# Altium PCB Green_house.PcbDoc
Units mm, origin at the board's own origin, x right, y up, seen from the top; angles counter-clockwise.
Board outline 137.29 x 102.74 mm, 2 copper layers (Top Layer, Bottom Layer); 42 components, 35 nets, 132 pads, 0 vias.
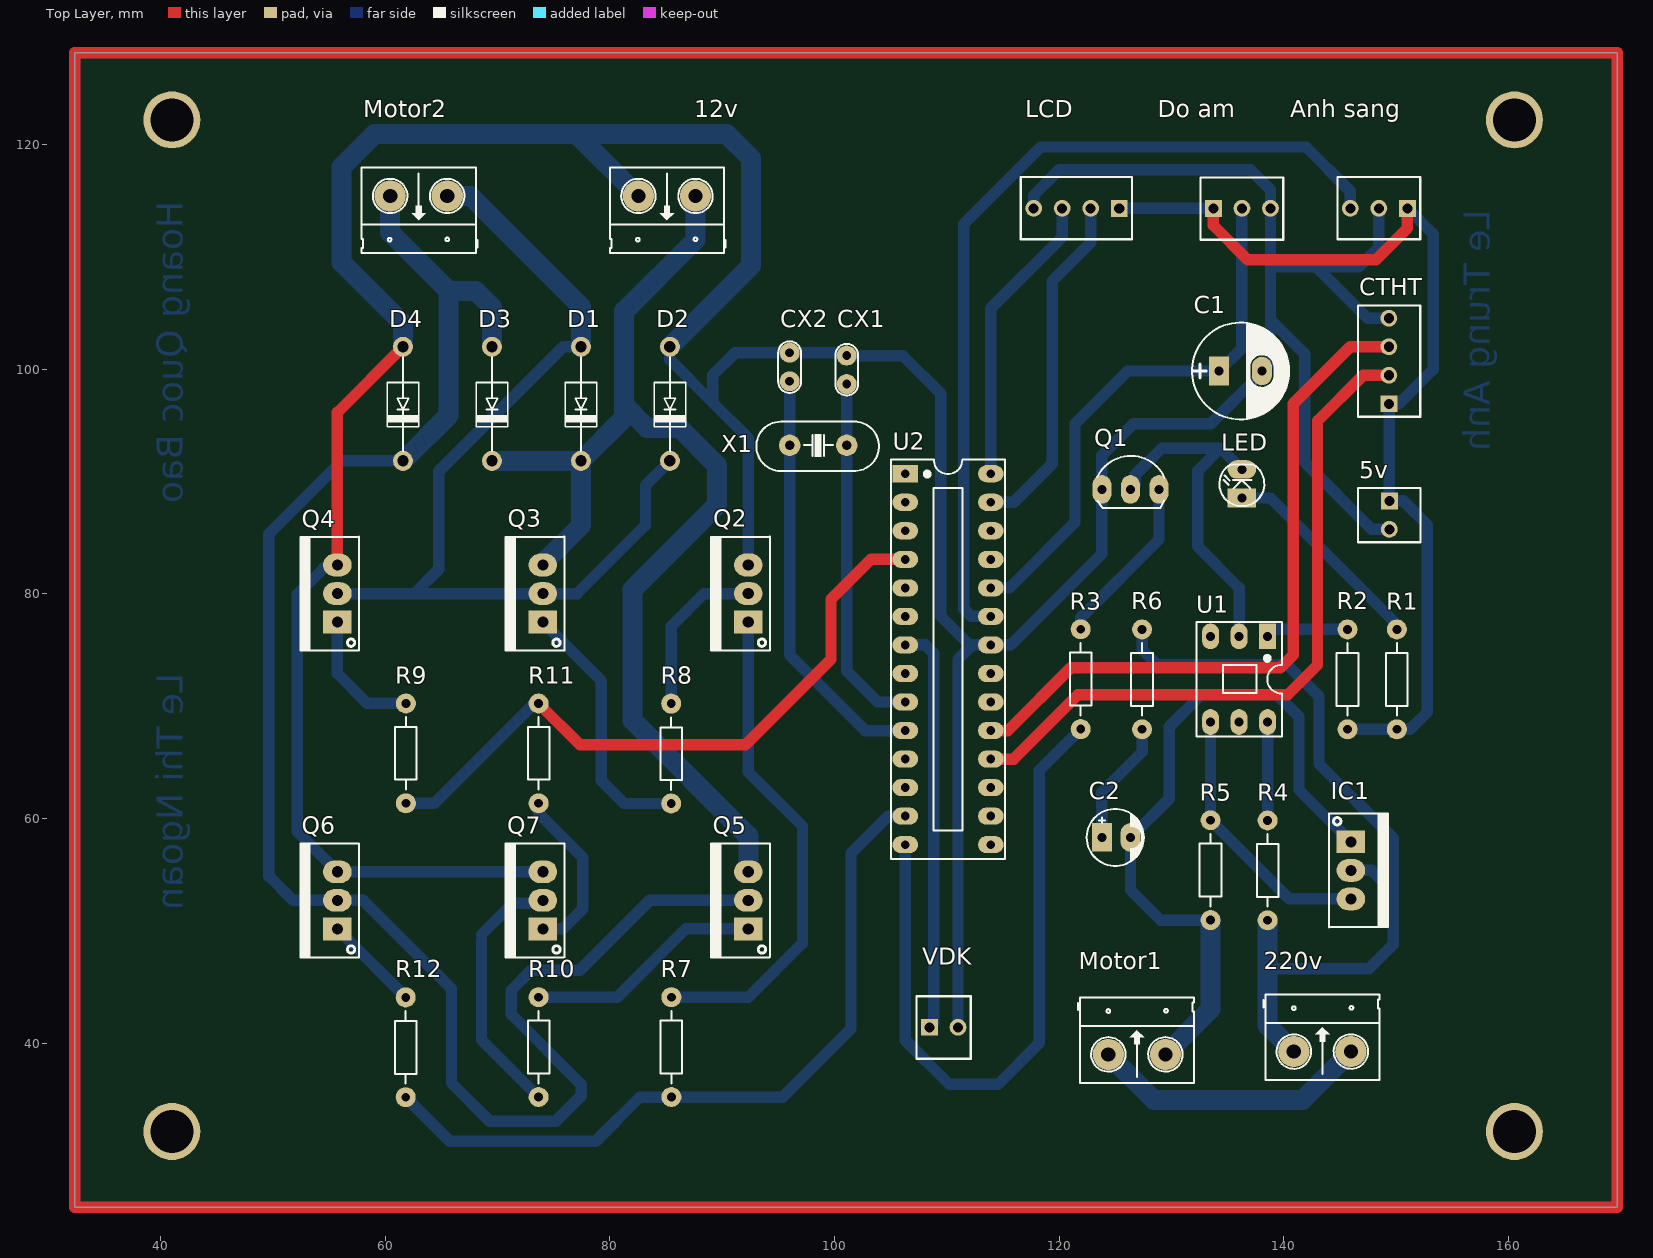
[diagram p0: Top Layer view]
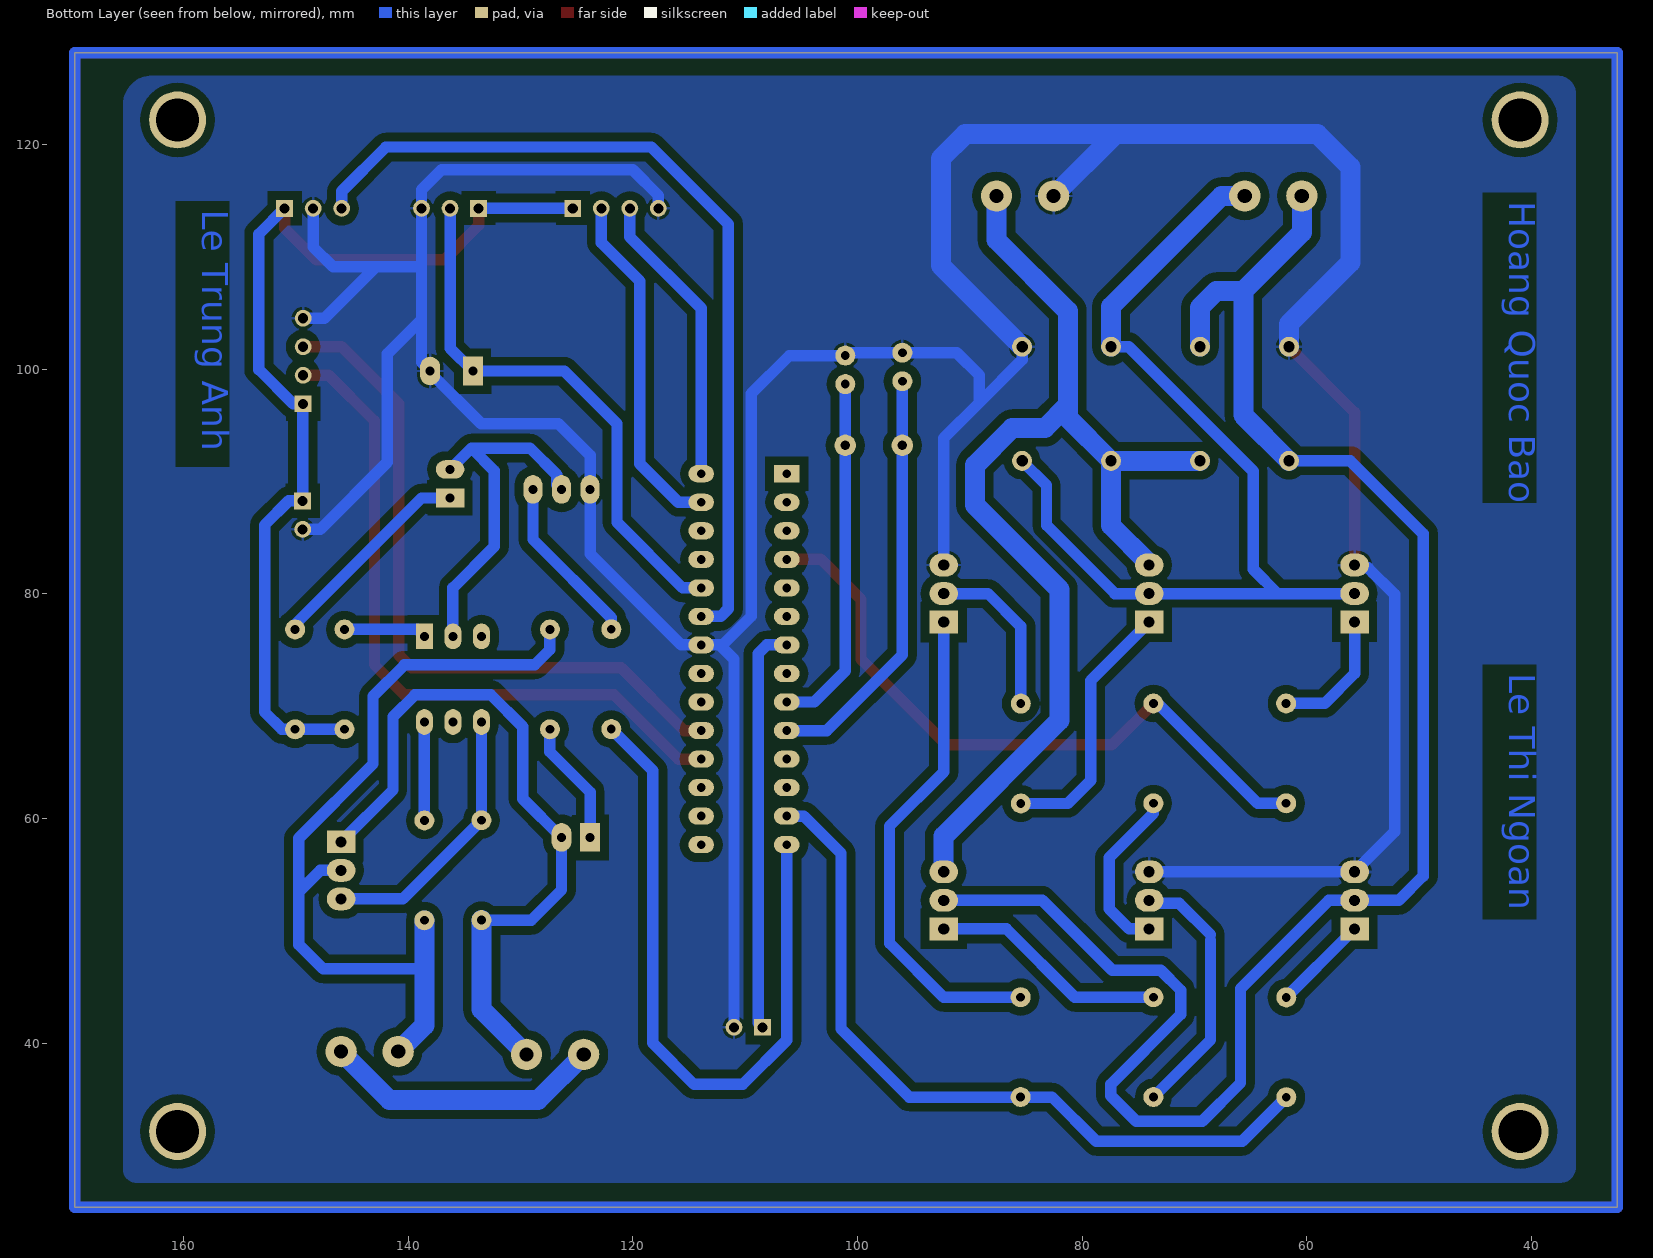
[diagram p1: Bottom Layer view, seen from below]
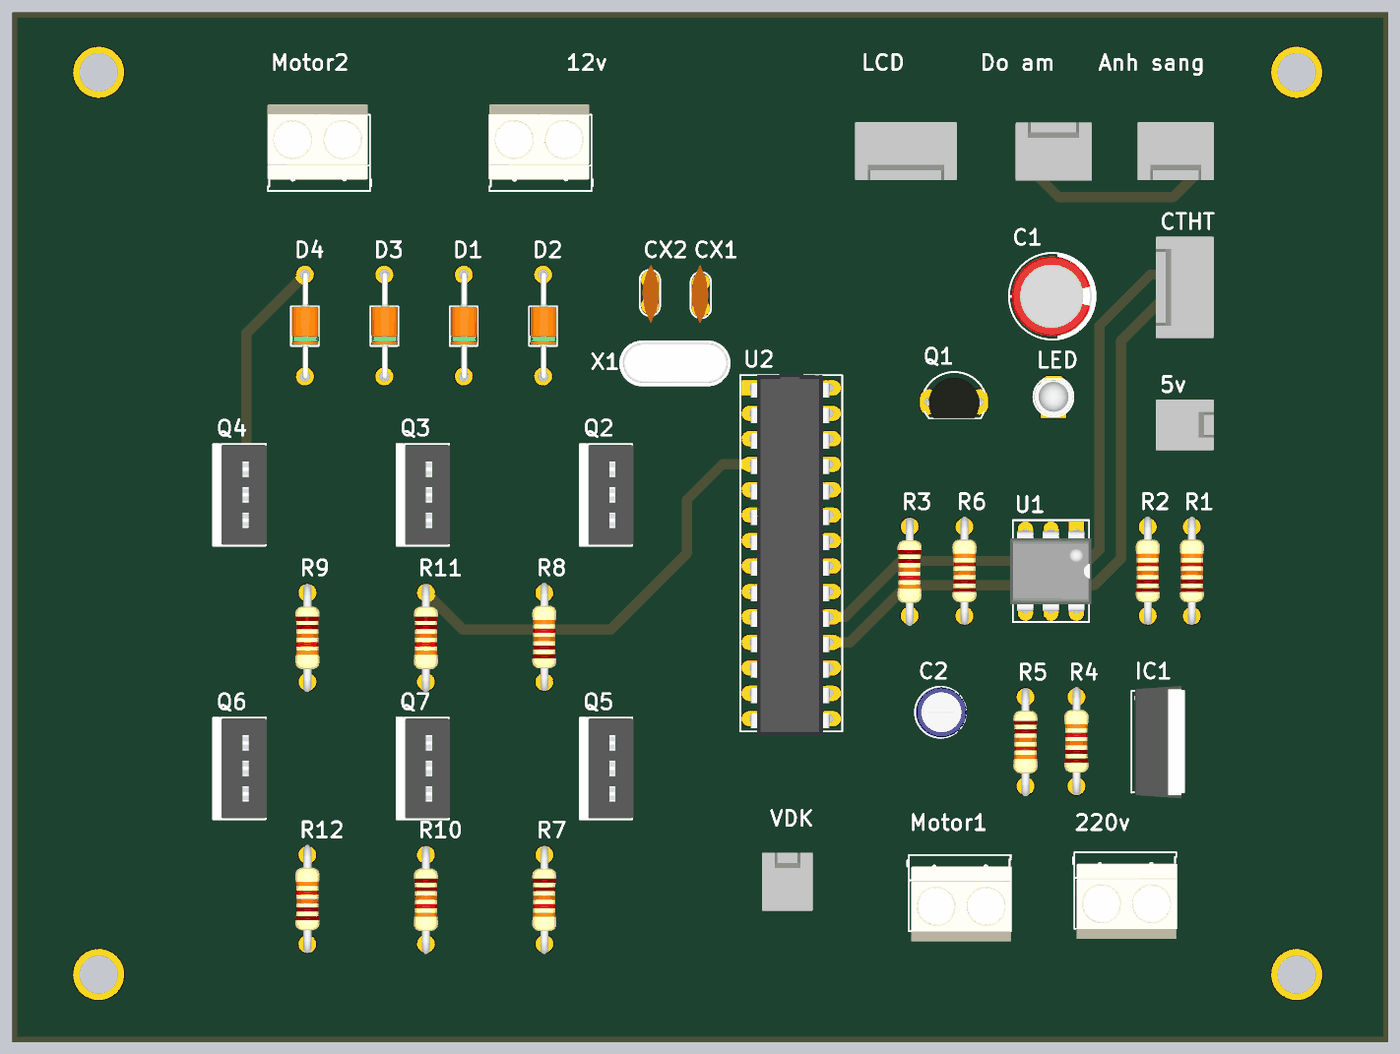
[diagram p2: 3D render of the assembled board from above, using the file's embedded part models]

## Layer stack, top to bottom
Top Solder: solder mask 0.0102, Solder Resist, Dk 3.5
Top Layer: signal copper 0.0356
Dielectric 1: dielectric 0.32, FR-4, Dk 4.8
Bottom Layer: signal copper 0.0356
Bottom Solder: solder mask 0.0102, Solder Resist, Dk 3.5

## Board outline
32.385,25.4 32.385,128.143 169.672,128.143 169.672,25.4

## Design rules (kind name [scope] priority, off if disabled: settings)
Clearance [All] p1: gap=0.762 ignorepadtopadclearanceinfootprint=FALSE
PolygonConnect [All] p1: connectstyle=Relief reliefconductorwidth=0.254 reliefentries=4 polygonreliefangle="90 Angle" airgapwidth=0.254
RoutingVias [All] p1: holewidth=0.711 width=1.27 viastyle="Through Hole" minholewidth=0.711 minwidth=1.27 maxholewidth=0.711 maxwidth=1.27
SolderMaskExpansion [All] p1: expansion=0.102
Width [All] p1: maxlimit=2.286 minlimit=1.016 preferedwidth=1.778
30 further rules are at their usual default settings.

## Components (designator, comment, footprint, x,y, rotation, side; value= is the part's Value field where it differs from the comment)
5v "Header 2" HDR2 149.393,88.265 r270 top
12v "Header 2" HED2 87.63,115.402 r180 top
220v "Hed2" HED2 140.892,39.243 r0 top value="Header 2"
"Anh sang" "Header3" HDR3 151.003,114.3 r180 top
C1 "100uF" CP1.5/3.4 134.239,99.822 r0 top value=100uF/35V/50V
C2 "10uF" CP1/2 123.81,58.306 r0 top value=10uF/50V
CTHT "Header4" HDR4 149.353,96.901 r90 top
CX1 "100pF" CN1 101.092,98.655 r90 top
CX2 "100pF" CN1 96.012,101.449 r270 top
D1 "Diode" DIO-1A 77.436,101.981 r270 top value=1N5007
D2 "Diode" DIO-1A 85.357,101.981 r270 top value=1N5007
D3 "Diode" DIO-1A 69.516,101.981 r270 top value=1N5007
D4 "Diode" DIO-1A 61.595,101.981 r270 top value=1N5007
"Do am" "Header 3" HDR3 133.731,114.3 r0 top
IC1 "BT137" QTO-220 145.972,57.912 r270 top value=LM317
LCD "Header4" HDR4 125.349,114.3 r180 top
LED "LED" LED-3 136.271,88.519 r90 top value="LED 3 ly Single Colour"
Motor1 "Header 2" HED2 124.384,38.989 r0 top
Motor2 "Header 2" HED2 65.532,115.402 r180 top
Q1 "C1815" QTO-92 126.35,89.281 r0 top
Q2 "TIP41C" TO220-123 92.329,77.47 r90 top
Q3 "TIP42C" TO220-123 74.041,77.47 r90 top
Q4 "TIP41C" TO220-123 55.753,77.47 r90 top
Q5 "TIP42C" TO220-123 92.329,50.165 r90 top
Q6 "TIP41C" TO220-123 55.753,50.165 r90 top
Q7 "TIP41C" TO220-123 74.041,50.165 r90 top
R1 "Res1" R1/4W 150.062,76.82 r270 top value=1K
R2 "Res1" R1/4W 145.67,76.82 r270 top value=220
R3 "Res1" R1/4W 121.92,67.945 r90 top value=1K
R4 "Res1" R1/4W 138.557,59.817 r270 top value=220
R5 "Res1" R1/4W 133.477,50.942 r90 top value=330
R6 "Res1" R1/4W 127.381,76.82 r270 top value=1K
R7 "Res1" R1/4W 85.483,35.194 r90 top value=1K
R8 "Res1" R1/4W 85.471,70.216 r270 top value=1K
R9 "Res1" R1/4W 61.849,61.341 r90 top value=1K
R10 "Res1" R1/4W 73.666,35.194 r90 top value=1K
R11 "Res1" R1/4W 73.666,61.341 r90 top value=1K
R12 "Res1" R1/4W 61.837,44.069 r270 top value=1K
U1 "MOC3021" DIP6/W0.3 138.557,76.2 r180 top
U2 "ATmega328-PU" DIP28 106.299,90.678 r270 top
VDK "Header 2" HDR2 108.458,41.402 r0 top
X1 "12Mhz" XT2 98.552,93.205 r180 top value=4Mhz

## Footprints (in the part's own frame and the unit in brackets; to place one, negate y for a bottom-side part, rotate by r counter-clockwise, add the part's x,y. Pads: shape width x height; smd on the part's side, far side on the other; paste and mask are expansions set on the pad)
CN1 [mil]
  round 70 hole 31: 1(0,0) 2(100,0)
  silkscreen extent -40,-40 141,40, body extent -60,-30 170,37, height 265
CP1.5/3.4 [mil] "Tu hoa 220->470uF,16V, 470uF/16V,25V"
  rect 70x100 hole 32: 1(0,0)
  oval 70x100 hole 32: 2(150,0)
  silkscreen extent -95,-170 245,170, body extent -85,-157 230,157, height 446
CP1/2 [mil] "Tu hoa < 22uF/16>50V"
  rect 70x100 hole 32: 1(0,0)
  oval 70x100 hole 32: 2(100,0)
  silkscreen extent -53,-100 147,100, body extent -49,-99 149,99, height 287
DIO-1A [mil]
  round 70 hole 40: 1(0,0) 2(400,0)
  silkscreen extent 35,-55 365,55, body extent -11,-50 411,54, height 102
DIP6/W0.3 [mil] "6 PIN, W 300mil, Pin to pin 100mil"
  rect 60x90 hole 31.5: 1(0,0)
  oval 60x90 hole 31.5: 2(100,0) 3(200,0) 4(200,300) 5(100,300) 6(0,300)
  silkscreen extent -50,-50 250,350, body extent -58,-7 260,307, height 170
DIP28 [mil] "DIP, 18-Leads, Row Spacing 7.62mm, Pitch 2.54mm, Body 22.8x7.3mm, Window"
  rect 60x90 hole 31: 1(0,0)
  oval 60x90 hole 31: 2(100,0) 3(200,0) 4(300,0) 5(400,0) 6(500,0) 7(600,0) 8(700,0) 9(800,0) 10(900,0) 11(1000,0) 12(1100,0) 13(1200,0) 14(1300,0) 15(1300,300) 16(1200,300) 17(1100,300) 18(1000,300) 19(900,300) 20(800,300) 21(700,300) 22(600,300) 23(500,300) 24(400,300) 25(300,300) 26(200,300) 27(100,300) 28(0,300)
  silkscreen extent -50,-50 1350,350, body extent -50,-10 1367,300, height 200
HDR2 [mm] "Connector; Header; 2 Position"
  rect 1.5x1.5 hole 0.9: 1(0,0)
  round 1.5 hole 0.9: 2(2.54,0)
  silkscreen extent -1.14,-2.79 3.68,2.77, body extent -1.27,-2.92 3.81,2.88, height 11.72
HDR3 [mm] "Connector; Header; 3 Position"
  rect 1.5x1.5 hole 0.9: 1(0,0)
  round 1.5 hole 0.9: 2(2.54,0) 3(5.08,0)
  silkscreen extent -1.14,-2.79 6.22,2.74, body extent -1.27,-2.92 6.35,2.88, height 11.72
HDR4 [mm] "Connector; Header; 4 Position"
  rect 1.5x1.5 hole 0.9: 1(0,0)
  round 1.5 hole 0.9: 2(2.54,0) 3(5.08,0) 4(7.62,0)
  silkscreen extent -1.14,-2.79 8.76,2.74, body extent -1.27,-2.92 8.89,2.88, height 11.72
HED2 [mil] "Header 2, 2 pin, hight 300mil, Pin to Pin 200, Colour Green"
  round 110 hole 50: 1(0,0) 2(200,0)
  silkscreen extent -106,-100 300,200, body extent -92,-140 302,155, height 394
LED-3 [mil] "LED 2 PIN, 3ly Only colour"
  rect 65x100 hole 32: 1(0,0)
  oval 65x100 hole 32: 2(100,0)
  silkscreen extent -29,-78 118,79, body extent -25,-75 113,75, height 217
QTO-92 [mil] "TO-92"
  oval 66x100 hole 32: 1(-100,0) 2(0,0) 3(100,0)
  silkscreen extent -117,-65 120,118, body extent -109,-66 109,95, height 245
QTO-220 [mil] "TO-220 - 1-2-3"
  rect 80x100 hole 39: 1(0,0)
  oval 80x100 hole 39: 2(100,0) 3(200,0)
  silkscreen extent -100,-76 300,130, body extent -119,-64 322,121, height 755
R1/4W [mil] "R 1/4W, 2 Pin, 350mil"
  round 70 hole 31: 1(0,0) 2(350,0)
  silkscreen extent 48,-38 302,38, body extent -40,-47 386,47, height 111
TO220-123 [mil] "TO-220 - 1-2-3"
  rect 80x100 hole 39: 1(0,0)
  oval 80x100 hole 39: 2(100,0) 3(200,0)
  silkscreen extent -100,-76 300,130, body extent -95,-80 295,97, height 323
XT2 [mil] "Footpin for Crystal 2 pin"
  round 75 hole 34: 1(-100,0) 2(100,0)
  silkscreen extent -213,-83 217,90, body extent -216,-87 216,90, height 144

## Part data
5v VDK: library part Header2, "Header IDC, 2 x 1 Pin Vertical 2.54mm Pitch (Non-Boxed, Male)", Manufacturer="Würth Elektronik eiSos GmbH", partNo=613002143121, ComponentLink1 Description=Manufacturer, ComponentLink1URL=http://www.we-online.com, ComponentLink2 Description=Datasheet, ComponentLink2URL=http://katalog.we-online.de/em/datasheet/6130xx143121.pdf, Created by="Karrer Zheng", Created Date="29 March 2013", NoPins=02
12v Motor1 Motor2: library part Hed2, "Header 2 (Green)"
220v: "Header 2 (Green)"
"Anh sang": "Header IDC, 3 x 1 Pin Vertical 2.54mm Pitch (Non-Boxed, Male)", Manufacturer="Würth Elektronik eiSos GmbH", partNo=613002143121, ComponentLink1 Description=Manufacturer, ComponentLink1URL=http://www.we-online.com, ComponentLink2 Description=Datasheet, ComponentLink2URL=http://katalog.we-online.de/em/datasheet/6130xx143121.pdf, Created by="Karrer Zheng", Created Date="29 March 2013", NoPins=02
C1: library part CP3, "Cap 100uF/35V - 470uF/16V", Description 1="1000uF/6,3V - 470uF/16V - 330uF - 25V", Description 2="220uF/35V - 100uF/50V - 63V - 4,7uF/200V", Description 3="22uF => 33uF100V - 3,3uF => 4,7uF/250V", Description 4="2,2uF =>3,3uF/350 - 2,2uF/400V - 1uF/450V"
C2: library part CP1, "Cap P  0,1uF < 22uF , 16 - 50V", Description 1="10 => 220uF/6,3V/10V - 10uF => 100uF/16V", Description 2="0,1uF => 33uF/50V - 10uF => 22uF/63V", Description 3="0,47uF => 10uF/100V"
CTHT LCD: "Header IDC, 4 x 1 Pin Vertical 2.54mm Pitch (Non-Boxed, Male)", Manufacturer="Würth Elektronik eiSos GmbH", partNo=613002143121, ComponentLink1 Description=Manufacturer, ComponentLink1URL=http://www.we-online.com, ComponentLink2 Description=Datasheet, ComponentLink2URL=http://katalog.we-online.de/em/datasheet/6130xx143121.pdf, Created by="Karrer Zheng", Created Date="29 March 2013", NoPins=02
CX1 CX2: library part CN1, "Cap np  1pF - 472pF"
D1 D2 D3 D4: "Default Diode", Code - JEDEC=DO-214-AB, Published=8-Jun-2000, Publisher="Altium Limited", Revision="July-2002: Re-released for DXP Platform."
"Do am": library part Header3, "Header IDC, 3 x 1 Pin Vertical 2.54mm Pitch (Non-Boxed, Male)", Manufacturer="Würth Elektronik eiSos GmbH", partNo=613002143121, ComponentLink1 Description=Manufacturer, ComponentLink1URL=http://www.we-online.com, ComponentLink2 Description=Datasheet, ComponentLink2URL=http://katalog.we-online.de/em/datasheet/6130xx143121.pdf, Created by="Karrer Zheng", Created Date="29 March 2013", NoPins=02
IC1: "Triacs - 8A"
LED: "LED Single colour Green and Red"
Q1: "NPN 600mW, ECB", =C2383
Q2 Q4 Q6 Q7: "NPN 2W, BCE", =H1061
Q3 Q5: "PNP 2W, BCE", =A671
R1 R2 R3 R4 R5 R6 R7 R8 R9 R10 R11 R12: library part Res1_1, "Resistor", Manufacturer="Generic Components", Class=Passive, Published=08/06/2000, Publisher="Altium Hobart Technology Centre", SubClass=Resistor
U1: "Single Opto"
U2: "8-bit AVR Microcontroller, 32KB Flash, 1KB EEPROM, 2KB SRAM, 28-pin PDIP, Industrial Grade (-40癈 to 85癈)", Supplier Part Number 1=ATMEGA328-PU-ND, ComponentLink1Description="Manufacturer Link", ComponentLink1URL=http://www.atmel.com/products/avr/default.asp?, ComponentLink2Description="ATmega48A/48PA/88A/88PA/168A/168PA/328/328P Datasheet", ComponentLink2URL=http://www.atmel.com/dyn/resources/prod_documents/8271.pdf, ComponentLink3Description="ATmega48A/48PA/88A/88PA/168A/168PA/328/328P Summary", ComponentLink3URL=http://www.atmel.com/dyn/resources/prod_documents/8271S.pdf, ComponentLink4Description="Atmel.com Home", ComponentLink4URL=http://www.atmel.com, DatasheetVersion="revA, Jan-2010", PackageDescription="28-lead (0.300\"/7.62mm Wide) Plastic Dual Inline Package (PDIP)", PackageReference=28P3, PackageVersion="revB, Sep-2001", Published=1-Apr-2010, Publisher="Altium Limited", Supplier 1=Digi-Key, Supplier 2=Mouser, Supplier Part Number 2=556-ATMEGA328-PU
X1: library part XT2, "Crystal, 32.768 KHz, -40 to 85 degC, 3.2 x 1.5 x 0.9 mm SMD"

## Free pads (board coordinates)
  round 5.08 hole 3.81: 4(41.021,32.131) 4(41.021,122.174) 4(160.528,32.131) 4(160.528,122.174)

## Nets (pads, with @x,y where several pads share a name; then routed paths per layer and width w, separated by ;. In a path a pad name is that pad's centre, name@x,y a point inside that pad or via, vN(x,y) a via of type N, cw(c..) or ccw(c..) an arc to the next point about the centre after c; other vN are vias at no path point)
5v: 5v.1 "Anh sang.1" "Do am.1" CTHT.1 LCD.1 R1.2 R2.2 | length 89.2
  Top Layer w1.016: 133.731,114.3 133.731,112.776 136.779,109.728 148.209,109.728 151.003,112.522 151.003,114.3
  Bottom Layer w1.016: LCD.1 133.731,114.3 ; R2.2 R1.2 151.242,67.93 152.781,69.469 152.781,86.106 150.622,88.265 5v.1 149.393,96.861 CTHT.1 150.241,96.901 153.289,99.949 153.289,112.014 151.003,114.3
12V: 12v.1 D1.2 D3.2 Q3.3 Q5.3 | length 100.2
  Bottom Layer w1.778: D3.2 D1.2 ; Q3.3@74.041,82.677 77.436,86.072 D1.2 ; 12v.1 87.63,111.493 81.28,105.143 81.28,96.774 ; Q5.3@92.329,55.372 92.329,58.42 82.042,68.707 82.042,80.391 89.535,87.884 89.535,91.44 86.233,94.742 83.312,94.742 81.28,96.774 ; D1.2 81.28,95.665 81.28,96.774
GND: 5v.2 12v.2 "Anh sang.2" "Do am.3" C1.2 CTHT.4 CX1.2 CX2.1 D2.1 D4.1 LCD.4 Q1.1 Q2.3 Q4.3 Q6.3 Q7.3 U2.22 VDK.2 | length 388.5
  Top Layer w1.016: Q4.3 55.753,96.139 D4.1
  Bottom Layer w1.016: Q4.3 55.499,82.296 54.552,82.296 52.197,79.941 52.197,58.801 Q6.3 Q7.3 ; D2.1 85.357,100.825 89.154,97.028 ; Q2.3 92.329,93.853 89.154,97.028 ; VDK.2 110.998,74.168 112.268,75.438 ; LCD.4 117.729,115.443 120.015,117.729 137.033,117.729 138.811,115.951 138.811,114.3 138.811,109.093 ; 148.463,114.3 148.463,110.871 146.685,109.093 142.875,109.093 ; CTHT.4 147.447,104.521 142.875,109.093 ; 5v.2 147.828,85.725 141.859,91.694 141.859,101.346 138.811,104.394 ; 89.154,97.028 89.154,99.441 91.162,101.449 CX2.1 100.838,101.449 CX1.2 106.069,101.195 109.474,97.79 109.474,77.978 112.014,75.438 112.268,75.438 ; 112.268,75.438 U2.22 115.697,75.438 123.81,83.551 Q1.1 123.81,92.314 126.619,95.123 133.495,95.123 138.049,99.677 C1.2 138.811,100.584 138.811,104.394 ; 138.811,104.394 138.811,109.093 ; 138.811,109.093 142.875,109.093
  Bottom Layer w1.778: 59.182,106.439 56.134,109.487 56.134,117.983 59.055,120.904 77.048,120.904 ; 59.189,106.433 61.595,104.026 D4.1 ; 12v.2 77.048,120.904 ; D2.1 92.583,109.207 92.583,118.745 90.424,120.904 77.048,120.904
Net220v_1: 220v.1 IC1.2 R4.2 R6.1 | length 73.7
  Bottom Layer w1.016: R6.1 127.381,75.027 128.748,73.66 140.335,73.66 143.129,70.866 143.129,64.837 149.733,58.233 149.733,53.467 ; 138.557,46.609 147.574,46.609 149.733,48.768 149.733,53.467 ; IC1.2@145.845,55.245 IC1.2 147.828,55.372 149.733,53.467
  Bottom Layer w1.778: R4.2 138.557,46.609 138.557,41.578 220v.1
  Bottom Layer w2.286: 220v.1 220v.1@141.019,39.37
Net220v_2: 220v.2 Motor1.1 | length 25.1
  Bottom Layer w1.778: Motor1.1 128.448,34.925 141.654,34.925 220v.2
"NetAnh sang_3": "Anh sang.3" U2.23 | length 77.4
  Bottom Layer w1.016: U2.23 112.179,77.978 111.506,78.651 111.506,112.903 118.364,119.761 141.986,119.761 145.923,115.824 145.923,114.3
NetC1_1: "Do am.2" C1.1 U2.24 | length 48.8
  Bottom Layer w1.016: U2.24 115.57,80.518 121.412,86.36 121.412,95.123 126.111,99.822 C1.1 136.271,101.854 136.271,114.3
NetC2_1: C2.1 R6.2 | length 11.1
  Bottom Layer w1.016: C2.1 123.81,62.342 127.381,65.913 R6.2
NetC2_2: C2.2 IC1.1 Motor1.2 R5.1 | length 64.4
  Bottom Layer w1.016: R5.1 129.032,50.942 126.35,53.624 C2.2 129.794,61.749 129.794,68.152 132.635,70.993 139.399,70.993 141.351,69.041 141.351,62.533 IC1.1
  Bottom Layer w1.778: Motor1.2 133.477,43.002 R5.1
NetCTHT_2: CTHT.2 U2.18 | length 62.3
  Top Layer w1.016: U2.18 115.951,65.278 121.666,70.993 140.335,70.993 143.002,73.66 143.002,95.377 147.066,99.441 CTHT.2
NetCTHT_3: CTHT.3 U2.19 | length 62.7
  Top Layer w1.016: U2.19 115.443,67.818 121.031,73.406 139.7,73.406 140.843,74.549 140.843,96.901 145.923,101.981 CTHT.3
NetCX1_1: CX1.1 U2.9 X1.1 | length 31.9
  Bottom Layer w1.016: CX1.1 X1.1 101.092,73.12 103.854,70.358 U2.9
NetCX2_2: CX2.2 U2.10 X1.2 | length 37.4
  Bottom Layer w1.016: CX2.2 X1.2 96.012,74.549 102.743,67.818 U2.10
NetD1_1: D1.1 D2.2 Motor2.1 Q3.2 Q4.2 | length 85.2
  Bottom Layer w1.016: Q4.2 62.611,80.01 ; D1.1 75.86,101.981 64.77,90.891 64.77,82.169 62.611,80.01 ; D2.2 83.185,89.649 83.185,86.106 77.089,80.01 Q3.2 62.611,80.01
  Bottom Layer w1.778: Motor2.1 67.605,115.402 77.436,105.571 D1.1
NetD3_1: D3.1 D4.2 Motor2.2 Q5.2 Q6.2 | length 159.9
  Top Layer w1.016: Q6.2 Q6.2@56.007,52.451
  Bottom Layer w1.016: D4.2 56.134,91.821 49.657,85.344 49.657,54.864 51.816,52.705 Q6.2 58.039,52.705 65.913,44.831 65.913,36.449 69.327,33.035 75.199,33.035 77.47,35.306 77.47,36.322 71.247,42.545 71.247,44.718 73.011,46.482 77.338,46.482 83.561,52.705 Q5.2
  Bottom Layer w1.778: Motor2.2 60.452,112.141 65.659,106.934 ; D4.2 65.659,95.885 65.659,106.934 ; D3.1 69.516,105.49 68.072,106.934 65.659,106.934
NetIC1_3: IC1.3 R5.2 U1.4 | length 24.1
  Bottom Layer w1.016: U1.4 R5.2 140.477,52.832 IC1.3
NetLCD_2: LCD.2 U2.27 | length 31
  Bottom Layer w1.016: U2.27 115.951,88.138 119.38,91.567 119.38,107.823 122.809,111.252 LCD.2
NetLCD_3: LCD.3 U2.28 | length 26.3
  Bottom Layer w1.016: U2.28 113.919,105.41 120.269,111.76 LCD.3
NetLED_1: LED.1 R1.1 | length 18.9
  Bottom Layer w1.016: LED.1 138.811,88.519 150.062,77.268 R1.1
NetLED_2: LED.2 Q1.2 U1.2 | length 31.9
  Bottom Layer w1.016: Q1.2 126.782,89.713 126.782,90.586 129.16,92.964 134.366,92.964 ; U1.2 136.017,80.518 132.334,84.201 132.334,90.932 134.366,92.964 ; LED.2 134.366,92.964
NetQ1_3: Q1.3 R3.2 | length 15.3
  Bottom Layer w1.016: R3.2 121.92,77.851 128.89,84.821 Q1.3
NetQ2_1: Q2.1 R7.2 | length 44.2
  Bottom Layer w1.016: R7.2 92.344,44.084 97.155,48.895 97.155,59.309 92.329,64.135 Q2.1
NetQ2_2: Q2.2 R8.1 | length 14.9
  Bottom Layer w1.016: R8.1 85.471,77.089 88.392,80.01 Q2.2
NetQ3_1: Q3.1 R8.2 | length 23.3
  Bottom Layer w1.016: Q3.1 79.248,72.263 79.248,63.373 81.295,61.326 R8.2
NetQ4_1: Q4.1 R9.2 | length 11.8
  Bottom Layer w1.016: Q4.1 55.753,72.898 58.42,70.231 R9.2
NetQ5_1: Q5.1 R10.2 | length 21.2
  Bottom Layer w1.016: R10.2 80.66,44.084 86.741,50.165 Q5.1
NetQ6_1: Q6.1 R12.1 | length 8.4
  Bottom Layer w1.016: Q6.1 Q6.1@56.249,50.165 ; Q6.1@56.249,49.657 R12.1
NetQ7_1: Q7.1 R11.1 | length 14.4
  Bottom Layer w1.016: 73.666,60.452 77.597,56.521 77.597,51.943 75.819,50.165 Q7.1
NetQ7_2: Q7.2 R10.1 | length 22.8
  Bottom Layer w1.016: 68.58,49.145 68.58,40.28 R10.1 ; 68.58,49.653 71.378,52.451 73.787,52.451 Q7.2
NetR2_1: R2.1 U1.1 | length 7.4
  Bottom Layer w1.016: U1.1 139.177,76.82 R2.1
NetR3_1: R3.1 U2.14 | length 62
  Bottom Layer w1.016: U2.14 106.299,40.259 110.236,36.322 114.554,36.322 118.237,40.005 118.237,64.262 R3.1
NetR4_1: R4.1 U1.6 | length 8.8
  Bottom Layer w1.016: R4.1 U1.6
NetR7_1: R7.1 R12.2 U2.13 | length 67.2
  Bottom Layer w1.016: R12.2 65.758,31.257 78.755,31.257 82.692,35.194 R7.1 95.392,35.194 101.473,41.275 101.473,56.896 104.775,60.198 U2.13
NetR9_1: R9.1 R11.2 U2.4 | length 59.6
  Top Layer w1.016: R11.2 77.349,66.548 92.075,66.548 99.695,74.168 99.695,79.502 103.251,83.058 U2.4
  Bottom Layer w1.016: R9.1 64.389,61.341 73.279,70.231 R11.2
VDK: U2.7 VDK.1 | length 36.3
  Bottom Layer w1.016: U2.7 108.077,75.438 108.839,74.676 108.839,41.783 VDK.1
pads on no net: U1.3 U1.5 U2.1 U2.2 U2.3 U2.5 U2.6 U2.8 U2.11 U2.12 U2.15 U2.16 U2.17 U2.20 U2.21 U2.25 U2.26

## Polygon pours and split planes (outlines as drawn)
GND on Bottom Layer (solid, pour order 84): 162.814,126.111 cw(c162.814,123.571) 165.354,123.571 165.354,28.702 cw(c164.211,28.702) 164.211,27.559 37.465,27.559 cw(c37.465,28.956) 36.068,28.956 36.068,124.46 cw(c37.719,124.46) 37.719,126.111
no net on Bottom Layer "Bottom Layer-No Net 1" (solid, pour order 70): 181.483,65.532
no net on Bottom Layer "Bottom Layer-No Net" (solid, pour order 44): 36.957,126.238
GND on Bottom Layer "Bottom Layer-GND 1" (solid, pour order 28): 34.29,126.365

## Other copper
Bottom Layer:
  text "Hoang Quoc Bao" at 42.799,114.935 h4 r90
  text "Le Trung Anh" at 159.131,114.173 h4 r90
  text "Le Thi Ngoan" at 42.799,72.898 h4 r90
Multi-Layer:
  the board outline again, w1.016